# EAGLE board schmitt_rev2 (EAGLE 6.6.0)
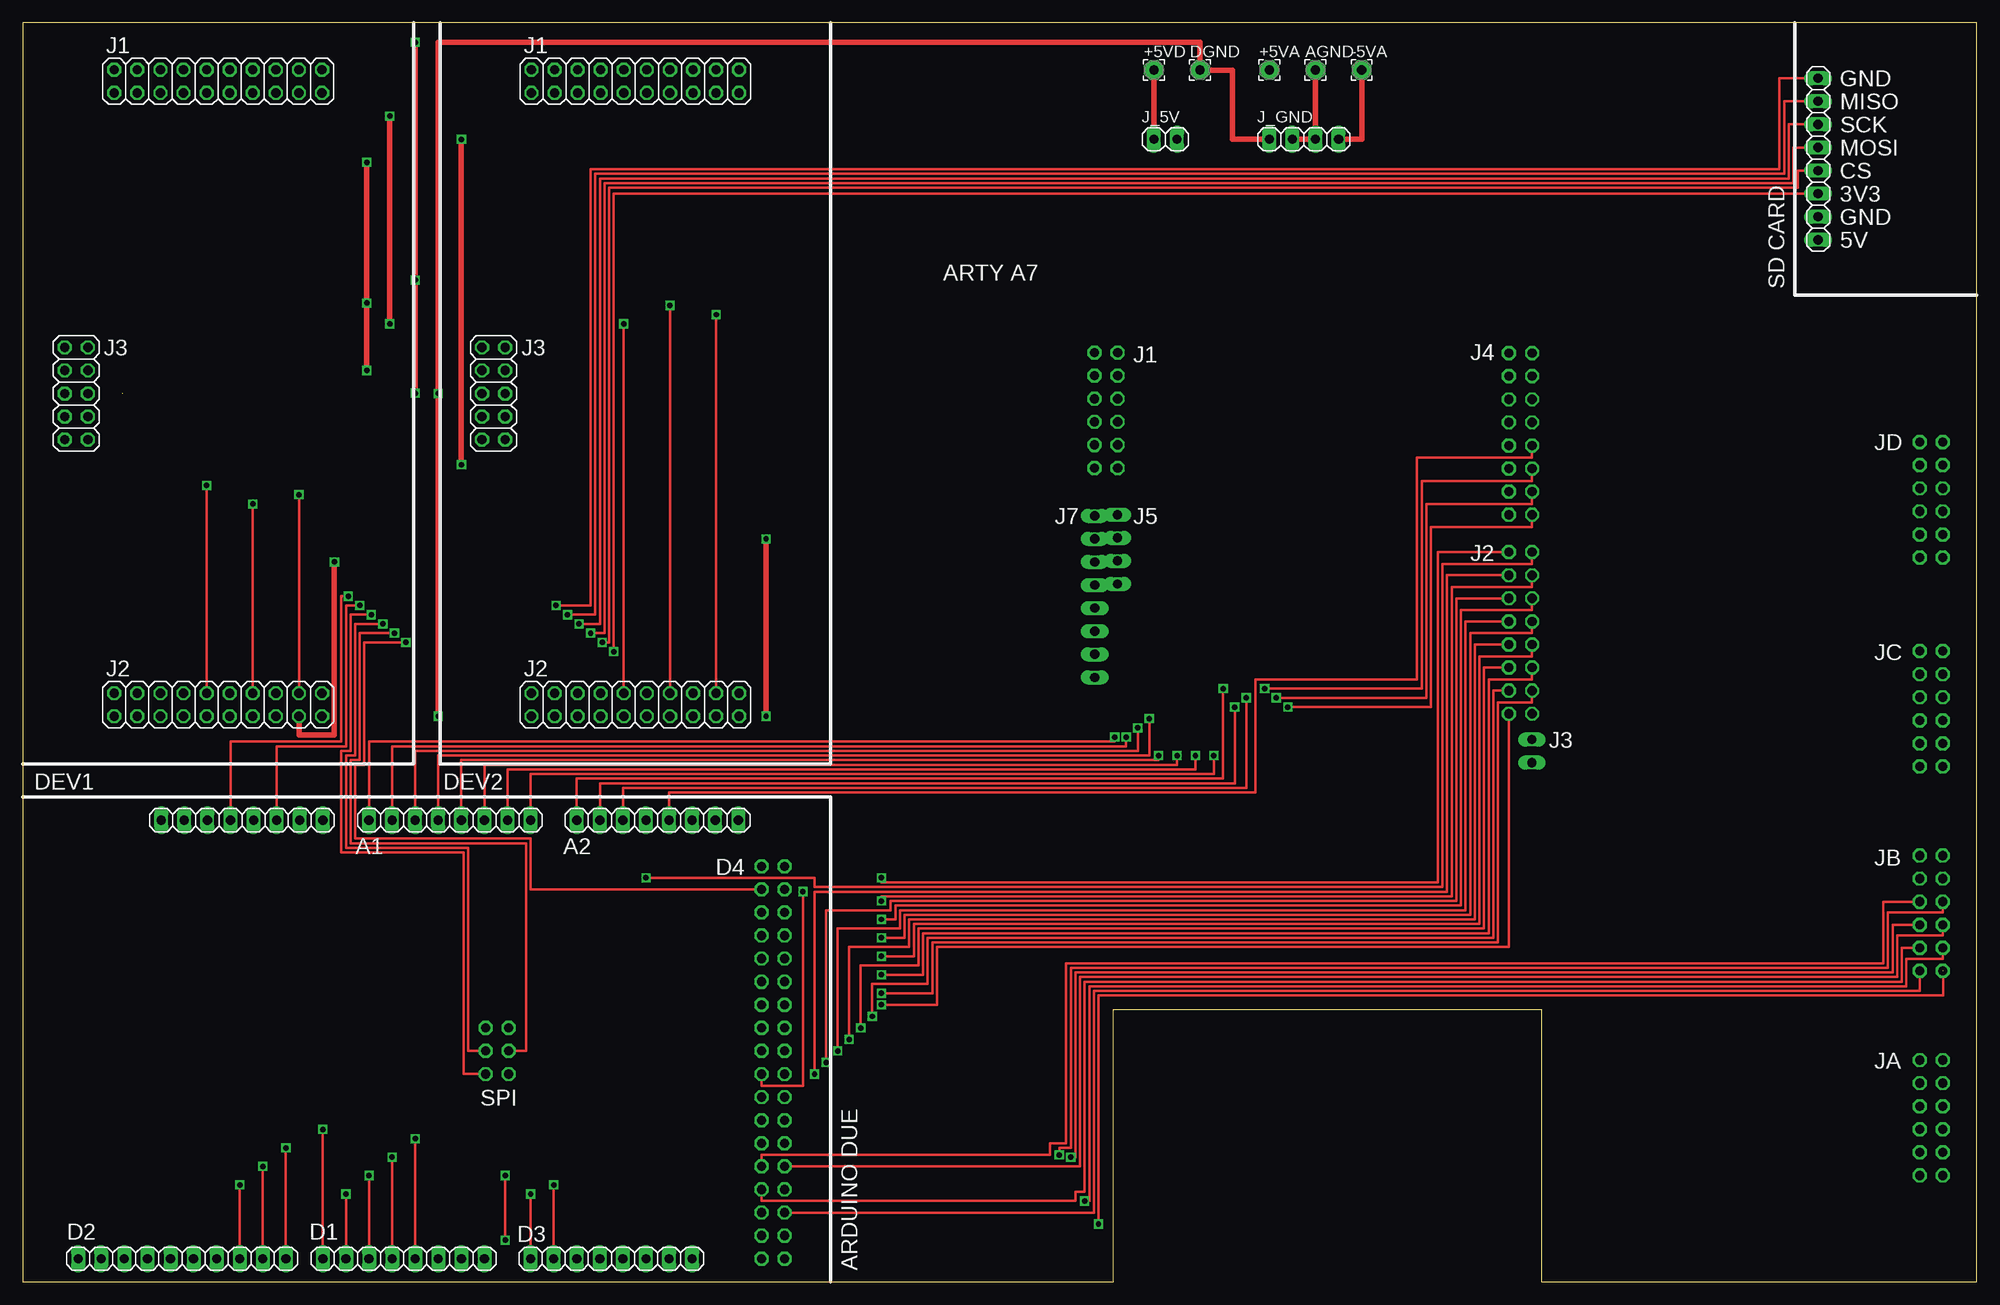
[diagram p0: board, top side]
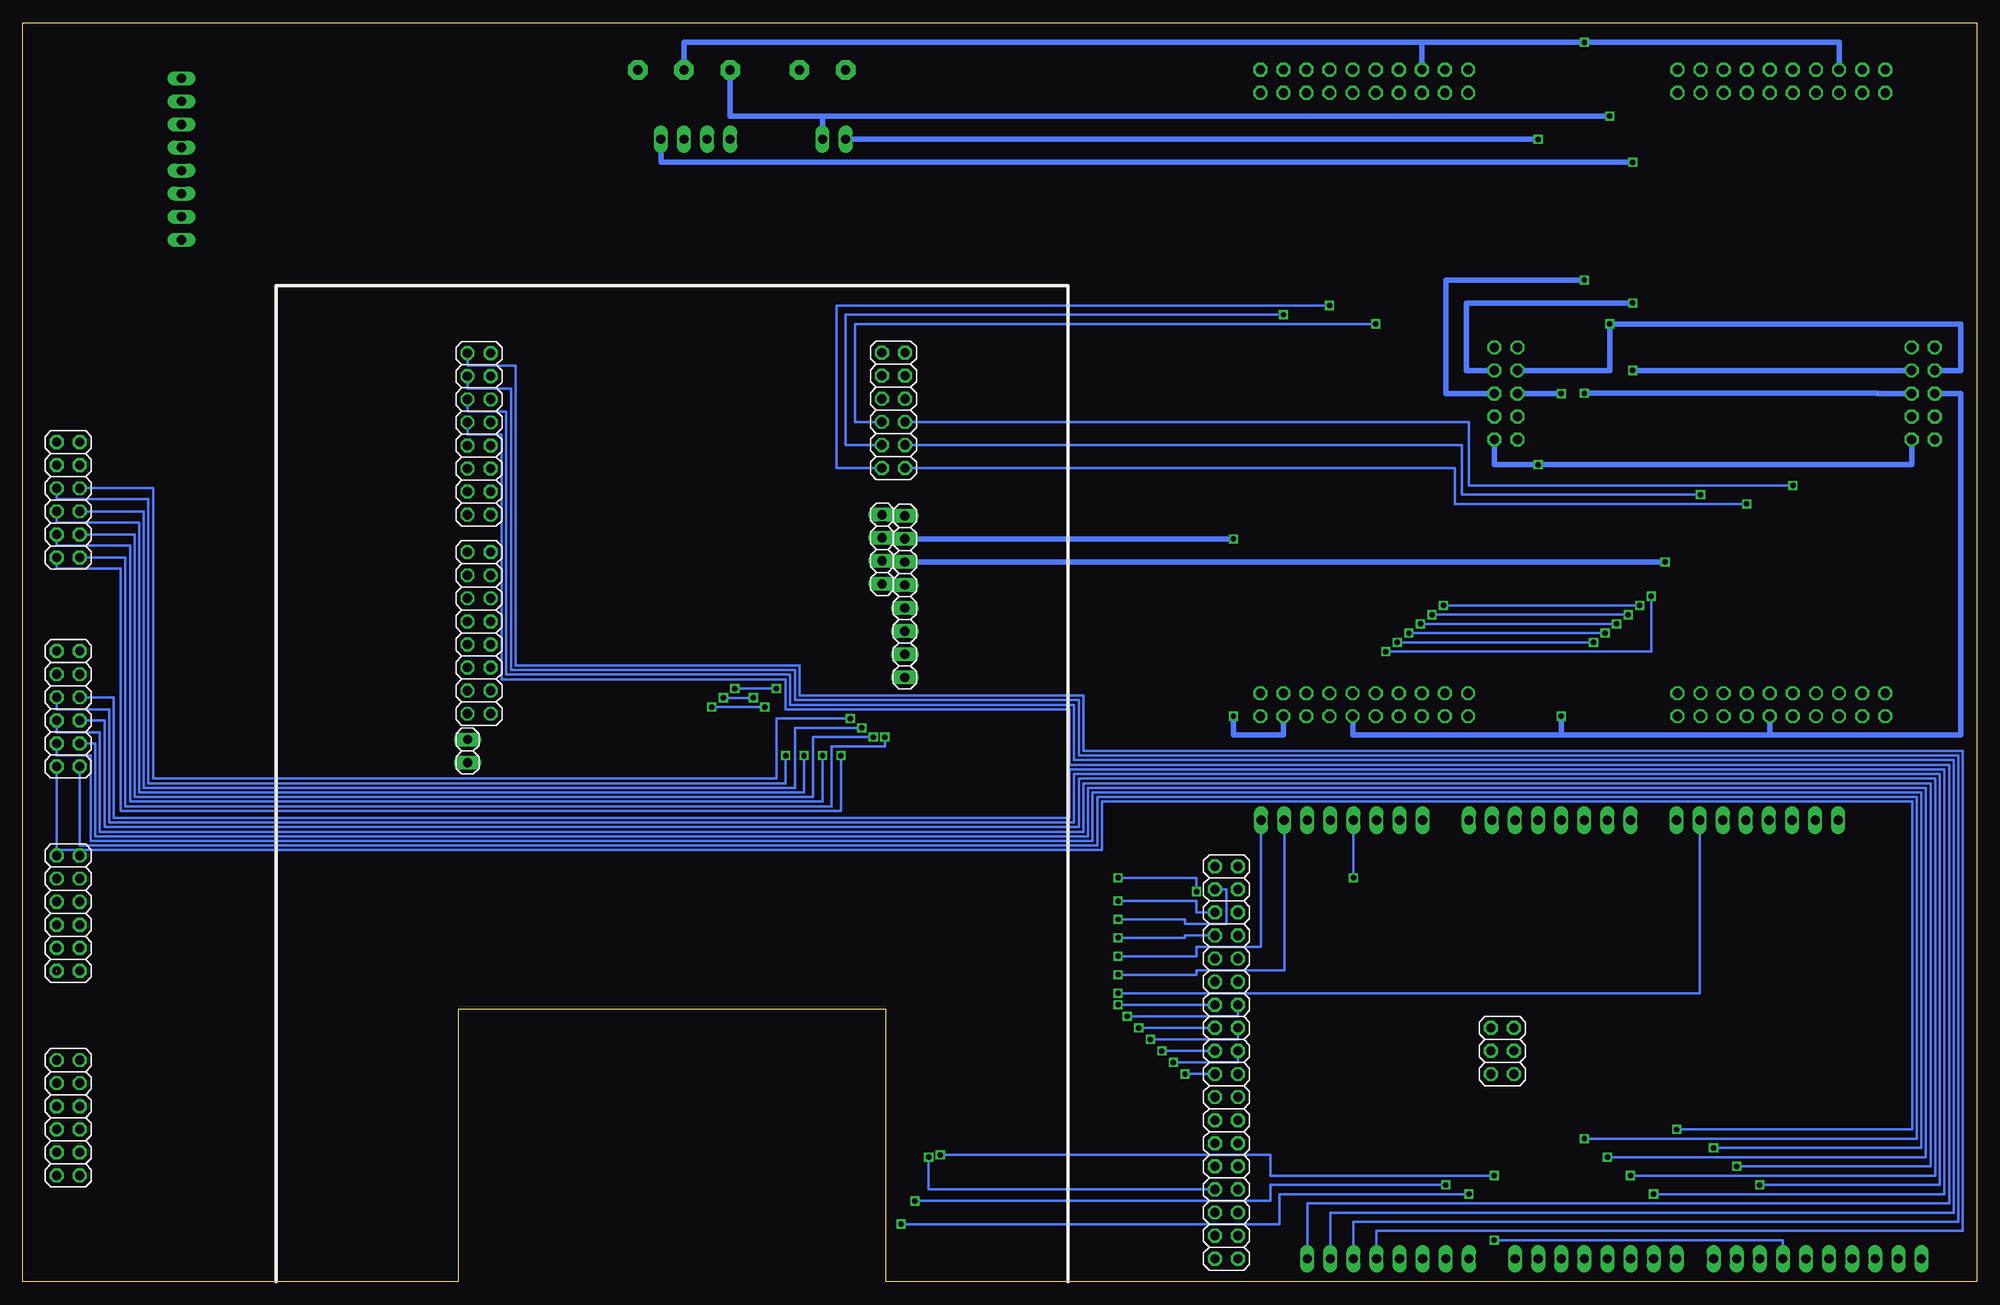
[diagram p1: board, bottom side, seen from below]

Size 215 x 138.55 mm. Coordinates in mm from the lower left corner, seen from the top.
Outline: 0,0 120,0 120,30 167.1,30 167.1,0 215,0 215,138.55 0,138.55 0,0
Copper layers (1*16): Top 0.035mm / dielectric 1.5mm / Bottom 0.035mm
Design rules "default": minimum track width 10mil, minimum drill 24mil, track to track 8mil, track to pad 8mil, pad to pad 8mil, via to via 8mil, smd to smd 8mil, copper to edge 40mil, drill to drill 8mil, minimum pad ring 10mil, minimum via ring 8mil, stop-mask expansion 4mil, vias tented up to drill 0mil, thermal gap 10mil

## Footprints (pad centres in the part's own frame; a part is rotated, then mirrored left to right if it is on the bottom)
2,15/1,0 = drill 1.016 pad 2.159 octagon: 1 0,0
1X08 = drill 1.016 long: 1 -8.89,0; 2 -6.35,0; 3 -3.81,0; 4 -1.27,0; 5 1.27,0; 6 3.81,0; 7 6.35,0; 8 8.89,0
1X10 = drill 1.016 long: 1 -11.43,0; 2 -8.89,0; 3 -6.35,0; 4 -3.81,0; 5 -1.27,0; 6 1.27,0; 7 3.81,0; 8 6.35,0; 9 8.89,0; 10 11.43,0
2X18 = drill 1.016 octagon: 1 -21.59,-1.27; 2 -21.59,1.27; 3 -19.05,-1.27; 4 -19.05,1.27; 5 -16.51,-1.27; 6 -16.51,1.27; 7 -13.97,-1.27; 8 -13.97,1.27; 9 -11.43,-1.27; 10 -11.43,1.27; 11 -8.89,-1.27; 12 -8.89,1.27; 13 -6.35,-1.27; 14 -6.35,1.27; 15 -3.81,-1.27; 16 -3.81,1.27; 17 -1.27,-1.27; 18 -1.27,1.27; 19 1.27,-1.27; 20 1.27,1.27; 21 3.81,-1.27; 22 3.81,1.27; 23 6.35,-1.27; 24 6.35,1.27; 25 8.89,-1.27; 26 8.89,1.27; 27 11.43,-1.27; 28 11.43,1.27; 29 13.97,-1.27; 30 13.97,1.27; 31 16.51,-1.27; 32 16.51,1.27; 33 19.05,-1.27; 34 19.05,1.27; 35 21.59,-1.27; 36 21.59,1.27
2X03 = drill 1.016 octagon: 1 -2.54,-1.27; 2 -2.54,1.27; 3 0,-1.27; 4 0,1.27; 5 2.54,-1.27; 6 2.54,1.27
2X06 = drill 1.016 octagon: 1 -6.35,-1.27; 2 -6.35,1.27; 3 -3.81,-1.27; 4 -3.81,1.27; 5 -1.27,-1.27; 6 -1.27,1.27; 7 1.27,-1.27; 8 1.27,1.27; 9 3.81,-1.27; 10 3.81,1.27; 11 6.35,-1.27; 12 6.35,1.27
2X08 = drill 1.016 octagon: 1 -8.89,-1.27; 2 -8.89,1.27; 3 -6.35,-1.27; 4 -6.35,1.27; 5 -3.81,-1.27; 6 -3.81,1.27; 7 -1.27,-1.27; 8 -1.27,1.27; 9 1.27,-1.27; 10 1.27,1.27; 11 3.81,-1.27; 12 3.81,1.27; 13 6.35,-1.27; 14 6.35,1.27; 15 8.89,-1.27; 16 8.89,1.27
1X02 = drill 1.016 long: 1 -1.27,0; 2 1.27,0
1X04 = drill 1.016 long: 1 -3.81,0; 2 -1.27,0; 3 1.27,0; 4 3.81,0
2X10 = drill 1.016 octagon: 1 -11.43,-1.27; 2 -11.43,1.27; 3 -8.89,-1.27; 4 -8.89,1.27; 5 -6.35,-1.27; 6 -6.35,1.27; 7 -3.81,-1.27; 8 -3.81,1.27; 9 -1.27,-1.27; 10 -1.27,1.27; 11 1.27,-1.27; 12 1.27,1.27; 13 3.81,-1.27; 14 3.81,1.27; 15 6.35,-1.27; 16 6.35,1.27; 17 8.89,-1.27; 18 8.89,1.27; 19 11.43,-1.27; 20 11.43,1.27
2X05 = drill 1.016 octagon: 1 -5.08,-1.27; 2 -5.08,1.27; 3 -2.54,-1.27; 4 -2.54,1.27; 5 0,-1.27; 6 0,1.27; 7 2.54,-1.27; 8 2.54,1.27; 9 5.08,-1.27; 10 5.08,1.27

## Placement (x,y rotation side)
+5VA  [2,15/1,0]  137.16,133.35 0 top
+5VD  [2,15/1,0]  124.46,133.35 0 top
-5VA  [2,15/1,0]  147.32,133.35 0 top
AGND  [2,15/1,0]  142.24,133.35 0 top
ARD  [1X08]  24.13,50.8 0 top
ARD_A1  [1X08]  46.99,50.8 0 top
ARD_A2  [1X08]  69.85,50.8 0 top
ARD_D1  [1X08]  41.91,2.54 180 top
ARD_D2  [1X10]  17.53,2.54 180 top
ARD_D3  [1X08]  64.77,2.54 0 top
ARD_D4  [2X18]  82.55,24.13 90 bottom
ARD_SPI  [2X03]  52.2,25.4 90 bottom
ARTY_J1  [2X06]  119.2,95.9 90 bottom
ARTY_J2  [2X08]  164.8,71.4 270 bottom
ARTY_J3  [1X02]  166.05,58.4 270 bottom
ARTY_J4  [2X08]  164.8,93.3 270 bottom
ARTY_J5  [1X04]  120.45,80.6 90 bottom
ARTY_J7  [1X08]  117.95,75.4 90 bottom
ARTY_JA  [2X06]  210,18.05 90 bottom
ARTY_JB  [2X06]  210,40.55 90 bottom
ARTY_JC  [2X06]  210,63.05 90 bottom
ARTY_JD  [2X06]  210,86.05 90 bottom
DEV1_J1  [2X10]  21.5,132.1 180 top
DEV1_J2  [2X10]  21.5,63.5 180 top
DEV1_J3  [2X05]  5.9,97.75 270 top
DEV2_J1  [2X10]  67.4,132.1 180 top
DEV2_J2  [2X10]  67.4,63.5 180 top
DEV2_J3  [2X05]  51.8,97.75 270 top
DGND  [2,15/1,0]  129.54,133.35 0 top
J_5V  [1X02]  125.73,125.73 0 top
J_GND  [1X04]  140.97,125.73 0 top
SD  [1X08]  197.54,123.55 90 top

## Library data of the parts
+5VA +5VD -5VA AGND DGND = wirepad
ARD ARD_A1 ARD_A2 ARD_D1-ARD_D4 ARD_SPI ARTY_J1-ARTY_J5 ARTY_J7 ARTY_JA ARTY_JB ARTY_JC ARTY_JD DEV1_J1-DEV1_J3 DEV2_J1-DEV2_J3 J_5V J_GND SD = pinhead

## Nets
+5VA: +5VA.1 DEV1_J3.3 DEV2_J3.3 J_5V.2
+5VD: +5VD.1 DEV1_J3.10 DEV2_J3.10 J_5V.1
-5VA: -5VA.1 DEV1_J3.4 DEV2_J3.4 J_GND.4
AGND: AGND.1 DEV1_J1.15 DEV1_J3.6 DEV2_J1.15 DEV2_J3.6 J_GND.2 J_GND.3
AMP0: ARD_D3.5 ARTY_J4.1
AMP1: ARD_D3.6 ARTY_J4.3
AMP2: ARD_D3.7 ARTY_J4.5
AMP3: ARD_D3.8 ARTY_J4.7
AR_GND: ARD.7 ARTY_J2.13
ARD_SPI: ARD_SPI.6
CHADDR: ARD_A2.5 ARTY_J4.9
D0: ARD_D4.6 ARTY_JB.1
D1: ARD_D4.7 ARTY_JB.3
D1_24: ARTY_J7.6 DEV1_J2.4
D2: ARD_D4.8 ARTY_JB.5
D2_24: ARTY_J7.7 DEV2_J2.4
D3: ARD_D4.9 ARTY_JB.7
D4: ARD_D3.1 ARTY_JB.2
D5: ARD_D3.2 ARTY_JB.4
D6: ARD_D4.10 ARTY_JB.6
D7: ARD_D2.4 ARTY_JB.8
DGND: DEV1_J2.10 DEV1_J3.5 DEV2_J2.10 DEV2_J3.5 DGND.1 J_GND.1
ENW: ARD_A2.1 ARTY_J4.11
EXT0: ARD_D4.17 ARTY_J2.2
EXT1: ARD_D4.18 ARTY_J2.4
EXT2: ARD_D4.19 ARTY_J2.6
EXT3: ARD_D4.20 ARTY_J2.8
EXT4: ARD_D4.21 ARTY_J2.10
EXT5: ARD_D4.22 ARTY_J2.12
EXT6: ARD_D4.23 ARTY_J2.14
EXT7: ARD_D4.24 ARTY_J2.16
II0: ARD_D1.4 ARTY_JC.1
II1: ARD_D1.5 ARTY_JC.3
II2: ARD_D1.6 ARTY_JC.5
II3: ARD_D1.7 ARTY_JC.7
II4: ARD_D1.8 ARTY_JC.2
II5: ARD_D2.1 ARTY_JC.4
II6: ARD_D2.2 ARTY_JC.6
II7: ARD_D2.3 ARTY_JC.8
IP0: ARD_A1.1 ARTY_JD.1
IP1: ARD_A1.2 ARTY_JD.3
IP2: ARD_A1.3 ARTY_JD.5
IP3: ARD_A1.4 ARTY_JD.7
IP4: ARD_A1.5 ARTY_JD.2
IP5: ARD_A1.6 ARTY_JD.4
IP6: ARD_A1.7 ARTY_JD.6
IP7: ARD_A1.8 ARTY_JD.8
MOSI0: ARTY_J1.5 DEV1_J2.11
MOSI1: ARTY_J1.6 DEV2_J2.11
N$1: DEV1_J1.1
N$2: SD.2
N$8: DEV1_J1.2
N$9: ARD_D2.10
N$11: SD.1
N$13: ARD_D2.5
N$14: ARD_D2.6
N$15: ARD_D2.7
N$16: ARD_D2.8
N$17: ARD_D2.9
N$20: ARD_D1.2
N$21: ARD_D1.3
N$26: ARD_D1.1
N$31: ARD_D3.4
N$32: ARD_D3.3
N$35: ARD_SPI.2
N$37: ARD_SPI.5
N$38: ARTY_J7.8
N$40: DEV1_J2.1
N$41: ARTY_J1.8
N$42: ARTY_J1.10
N$43: ARTY_J1.12
N$46: ARTY_J1.11
N$47: ARD_D4.1
N$48: ARD_D4.3
N$49: ARD_D4.5
N$52: ARD_D4.11
N$53: ARD_D4.13
N$54: ARD_D4.15
N$59: ARD_D4.25
N$60: ARD_D4.27
N$61: ARD_D4.29
N$62: ARD_D4.31
N$64: ARD_D4.35
N$65: ARD_D4.2
N$66: ARD_D4.4
N$70: ARD_D4.12
N$71: ARD_D4.14
N$72: ARD_D4.16
N$77: ARD_D4.26
N$78: ARD_D4.28
N$82: ARD_D4.36
N$83: DEV1_J2.2
N$88: ARD_A2.6
N$90: DEV1_J3.1
N$99: ARD.8
N$100: ARD.2
N$101: ARD.3
N$103: ARD.5
N$106: ARD.1
N$107: ARTY_J1.9
N$108: ARTY_J1.7
N$109: DEV1_J3.2
N$110: ARTY_JA.1
N$111: ARTY_JA.2
N$114: ARTY_J4.2
N$116: ARTY_J3.1
N$119: ARTY_J5.1
N$120: ARTY_J7.1
N$122: ARTY_JB.9
N$123: ARTY_JB.11
N$128: ARTY_JB.10
N$129: ARTY_JB.12
N$131: ARTY_JA.4
N$132: ARTY_JA.6
N$133: ARTY_JA.8
N$134: ARTY_JA.10
N$135: ARTY_JA.12
N$136: ARTY_JA.11
N$137: ARTY_JA.9
N$138: ARTY_JA.7
N$139: ARTY_JA.5
N$140: ARTY_JA.3
N$146: ARTY_JD.10
N$147: ARTY_JD.12
N$148: ARTY_JD.11
N$149: ARTY_JD.9
N$158: ARTY_JC.10
N$159: ARTY_JC.12
N$160: ARTY_JC.11
N$161: ARTY_JC.9
N$167: ARTY_J2.15
N$177: ARTY_J3.2
N$187: ARTY_J4.4
N$188: ARTY_J4.6
N$189: ARTY_J4.8
N$190: ARTY_J4.10
N$191: ARTY_J4.12
N$192: ARTY_J4.14
N$193: ARTY_J4.16
N$195: ARTY_J5.2
N$196: ARTY_J5.3
N$197: ARTY_J5.4
N$205: ARTY_J7.2
N$206: ARTY_J7.3
N$207: ARTY_J7.4
N$208: ARTY_J7.5
N$213: DEV1_J1.3
N$214: DEV1_J1.5
N$215: DEV1_J1.7
N$216: DEV1_J1.9
N$217: DEV1_J1.11
N$218: DEV1_J1.13
N$220: DEV1_J1.17
N$221: DEV1_J1.19
N$222: DEV1_J1.20
N$223: DEV1_J1.18
N$224: DEV1_J1.16
N$225: DEV1_J1.14
N$226: DEV1_J1.12
N$227: DEV1_J1.10
N$228: DEV1_J1.8
N$229: DEV1_J1.6
N$230: DEV1_J1.4
N$234: DEV1_J2.5
N$236: DEV1_J2.9
N$238: DEV1_J2.13
N$239: DEV1_J2.15
N$240: DEV1_J2.17
N$241: DEV1_J2.19
N$242: DEV1_J2.20
N$243: DEV1_J2.18
N$244: DEV1_J2.16
N$245: DEV1_J2.14
N$246: DEV1_J2.12
N$248: DEV1_J2.8
N$249: DEV1_J2.6
N$255: DEV1_J3.7
N$256: DEV1_J3.9
N$260: DEV1_J3.8
N$262: DEV2_J1.1
N$263: DEV2_J1.3
N$264: DEV2_J1.5
N$265: DEV2_J1.7
N$266: DEV2_J1.9
N$267: DEV2_J1.11
N$268: DEV2_J1.13
N$270: DEV2_J1.17
N$271: DEV2_J1.19
N$272: DEV2_J1.20
N$273: DEV2_J1.18
N$274: DEV2_J1.16
N$275: DEV2_J1.14
N$276: DEV2_J1.12
N$277: DEV2_J1.10
N$278: DEV2_J1.8
N$279: DEV2_J1.6
N$280: DEV2_J1.4
N$281: DEV2_J1.2
N$282: DEV2_J2.1
N$284: DEV2_J2.5
N$286: DEV2_J2.9
N$288: DEV2_J2.13
N$289: DEV2_J2.15
N$290: DEV2_J2.17
N$291: DEV2_J2.19
N$292: DEV2_J2.20
N$293: DEV2_J2.18
N$294: DEV2_J2.16
N$295: DEV2_J2.14
N$296: DEV2_J2.12
N$298: DEV2_J2.8
N$299: DEV2_J2.6
N$301: DEV2_J2.2
N$302: DEV2_J3.1
N$305: DEV2_J3.7
N$306: DEV2_J3.9
N$307: DEV2_J3.2
N$310: DEV2_J3.8
RST: ARD_A2.7 ARTY_J2.11
RSTCH: ARD_A2.8 ARTY_J2.9
SCLK0: ARTY_J1.3 DEV1_J2.3
SCLK1: ARTY_J1.4 DEV2_J2.3
SD_3V3: ARD.4 SD.3
SD_CS: ARD_D4.33 SD.4
SD_GND: ARD.6 SD.8
SD_MISO: ARD_SPI.1 SD.7
SD_MOSI: ARD_SPI.4 SD.5
SD_SCK: ARD_SPI.3 SD.6
SS0: ARTY_J1.1 DEV1_J2.7
SS1: ARTY_J1.2 DEV2_J2.7
TRG0: ARD_D4.30 ARTY_J2.7
TRG1: ARD_D4.32 ARTY_J2.3
TRG2: ARD_D4.34 ARTY_J2.5
W: ARD_A2.2 ARTY_J4.15
WCONF: ARD_A2.4 ARTY_J2.1
WVADDR: ARD_A2.3 ARTY_J4.13

## Tracks (layer width: path | path; a pad name or v marks a point on that pad's centre or on a via)
+5VA  (via drill 0.6)
  Top 0.61: v40.39,128.27 v40.39,105.41
  Bottom 0.61: 127,128.27 137.16,128.27 +5VA.1 | DEV1_J3.3 1.78,100.29 1.78,105.41 v40.39,105.41 40.39,100.29 DEV2_J3.3 | J_5V.2 127,128.27 | 127,128.27 v40.39,128.27
+5VD  (via drill 0.6)
  Top 0.61: +5VD.1 J_5V.1 | v48.26,125.73 v48.26,89.92
  Bottom 0.61: DEV2_J3.10 53.07,89.92 v48.26,89.92 7.17,89.92 DEV1_J3.10 | J_5V.1 v48.26,125.73
-5VA  (via drill 0.6)
  Top 0.61: J_GND.4 147.32,125.73 -5VA.1 | v37.85,123.19 v37.85,107.7 v37.85,100.29
  Bottom 0.61: v37.85,107.7 56.13,107.7 56.13,100.29 DEV2_J3.4 | J_GND.4 144.78,123.19 v37.85,123.19 | DEV1_J3.4 v37.85,100.29
AGND  (via drill 0.6)  (1 unrouted)
  Top 0.61: AGND.1 J_GND.3 J_GND.2 | v43.18,136.4 v43.18,110.24 v43.18,97.79
  Bottom 0.61: DEV1_J1.15 15.15,136.4 v43.18,136.4 61.05,136.4 | DEV2_J1.15 61.05,136.4 | 61.05,136.4 142.24,136.4 AGND.1 | DEV1_J3.6 10.92,97.75 | v43.18,110.24 58.42,110.24 58.42,97.75 DEV2_J3.6 | 10.92,97.79 v43.18,97.79
AMP0
  Bottom 0.254: ARD_D3.5 66.04,5.59 1.52,5.59 1.52,58.42 98.3,58.42 98.3,64.52 129.54,64.52 129.54,67.82 160.78,67.82 160.78,100.84 166.07,100.84 ARTY_J4.1
AMP1
  Bottom 0.254: ARD_D3.6 68.58,6.6 2.03,6.6 2.03,57.91 98.81,57.91 98.81,64.01 130.05,64.01 130.05,67.31 161.29,67.31 161.29,98.3 166.07,98.3 ARTY_J4.3
AMP2
  Bottom 0.254: ARD_D3.7 71.12,7.62 2.54,7.62 2.54,57.4 99.31,57.4 99.31,63.5 130.56,63.5 130.56,66.8 161.8,66.8 161.8,95.76 166.07,95.76 ARTY_J4.5
AMP3
  Bottom 0.254: ARD_D3.8 73.66,8.64 3.05,8.64 3.05,56.9 99.82,56.9 99.82,62.99 131.06,62.99 131.06,66.29 162.31,66.29 162.31,93.22 166.07,93.22 ARTY_J4.7
AR_GND  (via drill 0.6)
  Top 0.254: v94.49,31.75 100.08,31.75 100.08,37.34 162.31,37.34 162.31,63.75 166.07,63.75 ARTY_J2.13
  Bottom 0.254: ARD.7 30.48,31.75 v94.49,31.75
CHADDR
  Top 0.254: ARD_A2.5 71.12,53.85 135.64,53.85 135.64,66.29 153.42,66.29 153.42,90.68 166.07,90.68 ARTY_J4.9
D0
  Top 0.254: ARD_D4.6 117.86,7.62 117.86,32 208.73,32 ARTY_JB.1
D1
  Top 0.254: ARD_D4.7 81.28,8.89 115.82,8.89 115.82,9.91 116.84,9.91 116.84,33.02 206.76,33.02 206.76,36.74 ARTY_JB.3
D1_24  (via drill 0.6)
  Top 0.61: DEV1_J2.4 30.39,60.2 34.29,60.2 v34.29,79.21
  Bottom 0.61: v34.29,79.21 ARTY_J7.6
D2  (via drill 0.6)
  Top 0.254: v115.32,13.72 115.82,13.72 115.82,34.04 205.74,34.04 205.74,39.28 ARTY_JB.5
  Bottom 0.254: ARD_D4.8 115.32,10.16 v115.32,13.72
D2_24  (via drill 0.6)
  Top 0.61: v81.79,62.23 v81.79,81.75
  Bottom 0.61: DEV2_J2.4 76.29,60.2 81.79,60.2 v81.79,62.23 | v81.79,81.75 ARTY_J7.7
D3
  Top 0.254: ARD_D4.9 81.28,13.97 113.03,13.97 113.03,15.24 114.81,15.24 114.81,35.05 204.72,35.05 204.72,41.82 ARTY_JB.7
D4  (via drill 0.6)  (1 unrouted)
  Top 0.254: ARD_D3.1 v55.88,9.65 | v118.36,6.35 118.36,31.5 211.33,31.5 211.33,34.2
  Bottom 0.254: v55.88,9.65 76.71,9.65 76.71,6.35 v118.36,6.35
D5  (via drill 0.6)
  Top 0.254: ARD_D3.2 v58.42,10.67 | v116.84,8.89 117.35,8.89 117.35,32.51 207.26,32.51 207.26,35.56 211.27,35.56 ARTY_JB.4
  Bottom 0.254: v58.42,10.67 77.72,10.67 77.72,8.89 v116.84,8.89
D6
  Top 0.254: ARD_D4.10 116.33,12.7 116.33,33.53 206.25,33.53 206.25,38.1 211.27,38.1 ARTY_JB.6
D7  (via drill 0.6)
  Top 0.254: v53.09,4.57 v53.09,11.68 | v114.05,13.97 114.05,14.73 115.32,14.73 115.32,34.54 205.23,34.54 205.23,40.64 211.27,40.64 ARTY_JB.8
  Bottom 0.254: ARD_D2.4 21.34,4.57 v53.09,4.57 | v53.09,11.68 77.72,11.68 77.72,13.97 v114.05,13.97
DGND  (via drill 0.6)
  Top 0.61: J_GND.1 133.1,125.73 133.1,133.35 DGND.1 129.54,136.4 45.72,136.4 v45.72,97.75 v45.72,62.23
  Bottom 0.61: DEV1_J3.5 1.78,97.75 1.78,60.2 22.77,60.2 | 22.77,60.2 DEV1_J2.10 | DEV2_J2.10 68.67,60.2 45.72,60.2 | v45.72,97.75 DEV2_J3.5 | 22.77,60.2 45.72,60.2 | v45.72,62.23 45.72,60.2
ENW  (via drill 0.6)
  Top 0.254: ARD_A2.1 60.96,55.37 132.08,55.37 v132.08,65.28 | v136.65,65.28 153.92,65.28 153.92,88.14 166.07,88.14 ARTY_J4.11
  Bottom 0.254: v132.08,65.28 v136.65,65.28
EXT0  (via drill 0.6)
  Top 0.254: ARD_D4.17 81.28,21.59 85.85,21.59 v85.85,42.93 | v94.49,44.45 94.49,43.94 155.7,43.94 155.7,80.29 ARTY_J2.2
  Bottom 0.254: v85.85,42.93 85.85,44.45 v94.49,44.45
EXT1  (via drill 0.6)
  Top 0.254: v87.12,22.86 87.12,42.93 156.72,42.93 156.72,77.22 156.72,77.47 156.72,77.75 ARTY_J2.4
  Bottom 0.254: ARD_D4.18 v87.12,22.86
EXT2  (via drill 0.6)
  Top 0.254: v88.39,24.13 88.39,40.89 95.5,40.89 95.5,41.91 157.73,41.91 157.73,75.21 ARTY_J2.6
  Bottom 0.254: ARD_D4.19 81.28,24.13 v88.39,24.13
EXT3  (via drill 0.6)
  Top 0.254: v89.66,25.4 89.66,38.86 96.52,38.86 96.52,40.89 158.75,40.89 158.75,71.37 158.75,71.88 158.75,72.67 ARTY_J2.8
  Bottom 0.254: ARD_D4.20 v89.66,25.4
EXT4  (via drill 0.6)
  Top 0.254: v90.93,26.67 90.93,36.83 97.54,36.83 97.54,39.88 159.77,39.88 159.77,70.13 ARTY_J2.10
  Bottom 0.254: ARD_D4.21 81.28,26.67 v90.93,26.67
EXT5  (via drill 0.6)
  Top 0.254: v92.2,27.94 92.2,34.8 98.55,34.8 98.55,38.86 160.78,38.86 160.78,61.72 160.78,61.98 160.78,67.59 ARTY_J2.12
  Bottom 0.254: ARD_D4.22 v92.2,27.94
EXT6  (via drill 0.6)
  Top 0.254: v93.47,29.21 93.47,32.77 99.57,32.77 99.57,37.85 161.8,37.85 161.8,64.52 161.8,64.77 161.8,65.05 ARTY_J2.14
  Bottom 0.254: ARD_D4.23 81.28,29.21 v93.47,29.21
EXT7  (via drill 0.6)
  Top 0.254: v94.49,30.48 100.58,30.48 100.58,36.83 163.53,36.83 ARTY_J2.16
  Bottom 0.254: ARD_D4.24 v94.49,30.48
II0  (via drill 0.6)
  Top 0.254: ARD_D1.4 v43.18,15.75
  Bottom 0.254: v43.18,15.75 6.6,15.75 6.6,53.34 96.77,53.34 96.77,48.01 208.73,48.01 ARTY_JC.1
II1  (via drill 0.6)
  Top 0.254: ARD_D1.5 v40.64,13.72
  Bottom 0.254: v40.64,13.72 5.59,13.72 5.59,54.36 97.79,54.36 97.79,49.02 207.01,49.02 207.01,59.24 ARTY_JC.3
II2  (via drill 0.6)
  Top 0.254: ARD_D1.6 v38.1,11.68
  Bottom 0.254: v38.1,11.68 4.57,11.68 4.57,55.37 98.81,55.37 98.81,50.04 205.99,50.04 205.99,61.78 ARTY_JC.5
II3  (via drill 0.6)
  Top 0.254: ARD_D1.7 v35.56,9.65
  Bottom 0.254: v35.56,9.65 3.56,9.65 3.56,56.39 99.82,56.39 99.82,51.05 204.98,51.05 204.98,64.32 ARTY_JC.7
II4  (via drill 0.6)
  Top 0.254: ARD_D1.8 v33.02,16.76
  Bottom 0.254: v33.02,16.76 7.11,16.76 7.11,52.83 96.27,52.83 96.27,47.5 211.27,47.5 ARTY_JC.2
II5  (via drill 0.6)
  Top 0.254: ARD_D2.1 v28.96,14.73
  Bottom 0.254: v28.96,14.73 6.1,14.73 6.1,53.85 97.28,53.85 97.28,48.51 207.52,48.51 207.52,57.91 211.27,57.91 ARTY_JC.4
II6  (via drill 0.6)
  Top 0.254: ARD_D2.2 v26.42,12.7
  Bottom 0.254: v26.42,12.7 5.08,12.7 5.08,54.86 98.3,54.86 98.3,49.53 206.5,49.53 206.5,60.45 211.27,60.45 ARTY_JC.6
II7  (via drill 0.6)
  Top 0.254: ARD_D2.3 v23.88,10.67
  Bottom 0.254: v23.88,10.67 4.06,10.67 4.06,55.88 99.31,55.88 99.31,50.55 205.49,50.55 205.49,62.99 211.27,62.99 ARTY_JC.8
IP0  (via drill 0.6)
  Top 0.254: ARD_A1.1 38.1,59.44 120.14,59.44 v120.14,59.94
  Bottom 0.254: v120.14,59.94 120.14,58.93 125.98,58.93 125.98,52.32 203.71,52.32 203.71,79.7 ARTY_JD.1
IP1  (via drill 0.6)
  Top 0.254: ARD_A1.2 40.64,58.93 121.41,58.93 v121.41,59.94
  Bottom 0.254: v121.41,59.94 128.02,59.94 128.02,53.34 202.69,53.34 202.69,82.24 ARTY_JD.3
IP2  (via drill 0.6)
  Top 0.254: ARD_A1.3 43.18,58.42 122.68,58.42 v122.68,60.96
  Bottom 0.254: v122.68,60.96 130.05,60.96 130.05,54.36 201.68,54.36 201.68,84.78 ARTY_JD.5
IP3  (via drill 0.6)
  Top 0.254: ARD_A1.4 45.72,57.91 123.95,57.91 v123.95,61.98
  Bottom 0.254: v123.95,61.98 132.08,61.98 132.08,55.37 200.66,55.37 200.66,87.32 ARTY_JD.7
IP4  (via drill 0.6)
  Top 0.254: ARD_A1.5 48.26,57.4 124.97,57.4 v124.97,57.91
  Bottom 0.254: v124.97,57.91 124.97,51.82 204.22,51.82 204.22,78.49 211.27,78.49 ARTY_JD.2
IP5  (via drill 0.6)
  Top 0.254: ARD_A1.6 50.8,56.9 127,56.9 v127,57.91
  Bottom 0.254: v127,57.91 127,52.83 203.2,52.83 203.2,81.03 211.27,81.03 ARTY_JD.4
IP6  (via drill 0.6)
  Top 0.254: ARD_A1.7 53.34,56.39 129.03,56.39 v129.03,57.91
  Bottom 0.254: v129.03,57.91 129.03,53.85 202.18,53.85 202.18,83.57 211.27,83.57 ARTY_JD.6
IP7  (via drill 0.6)
  Top 0.254: ARD_A1.8 55.88,55.88 131.06,55.88 v131.06,57.91
  Bottom 0.254: v131.06,57.91 131.06,54.86 201.17,54.86 201.17,86.11 211.27,86.11 ARTY_JD.8
MOSI0  (via drill 0.6)
  Top 0.254: DEV1_J2.11 v20.23,87.63
  Bottom 0.254: v20.23,87.63 55.88,87.63 55.88,94.63 ARTY_J1.5
MOSI1  (via drill 0.6)
  Top 0.254: DEV2_J2.11 v66.13,105.41
  Bottom 0.254: v66.13,105.41 123.44,105.41 123.44,94.63 ARTY_J1.6
RST  (via drill 0.6)
  Top 0.254: v94.49,33.78 99.06,33.78 99.06,38.35 161.29,38.35 161.29,66.29 166.07,66.29 ARTY_J2.11
  Bottom 0.254: ARD_A2.7 76.2,34.29 85.85,34.29 85.85,33.78 v94.49,33.78
RSTCH  (via drill 0.6)
  Top 0.254: v94.49,35.81 98.04,35.81 98.04,39.37 160.27,39.37 160.27,68.83 166.07,68.83 ARTY_J2.9
  Bottom 0.254: ARD_A2.8 78.74,36.83 85.85,36.83 85.85,35.81 v94.49,35.81
SCLK0  (via drill 0.6)
  Top 0.254: DEV1_J2.3 v30.39,86.61
  Bottom 0.254: v30.39,86.61 56.64,86.61 56.64,92.09 ARTY_J1.3
SCLK1  (via drill 0.6)
  Top 0.254: DEV2_J2.3 v76.29,106.43
  Bottom 0.254: v76.29,106.43 124.46,106.43 124.46,92.09 ARTY_J1.4
SD_3V3  (via drill 0.6)
  Top 0.254: ARD.4 22.86,59.44 35.05,59.44 35.05,75.44 v35.81,75.44 | v65.02,69.34 65.02,119.74 SD.3
  Bottom 0.254: v35.81,75.44 35.81,69.34 v65.02,69.34
SD_CS  (via drill 0.6)
  Top 0.254: ARD_D4.33 55.88,43.18 55.88,48.77 36.58,48.77 36.58,56.9 37.59,56.9 37.59,70.36 v42.16,70.36 | v63.75,70.36 64.52,70.36 64.52,120.4 195.33,120.4 195.33,122.28 SD.4
  Bottom 0.254: v42.16,70.36 v63.75,70.36
SD_GND  (via drill 0.6)
  Top 0.254: ARD.6 27.94,58.93 35.56,58.93 35.56,74.42 v37.08,74.42 | v58.67,74.42 62.48,74.42 62.48,122.43 193.29,122.43 193.29,132.44 SD.8
  Bottom 0.254: v37.08,74.42 v58.67,74.42
SD_MISO  (via drill 0.6)
  Top 0.254: ARD_SPI.1 48.51,22.86 48.51,47.24 35.05,47.24 35.05,58.42 36.07,58.42 36.07,73.41 v38.35,73.41 | v59.94,73.41 62.99,73.41 62.99,121.92 193.8,121.92 193.8,129.9 SD.7
  Bottom 0.254: v38.35,73.41 v59.94,73.41
SD_MOSI  (via drill 0.6)
  Top 0.254: ARD_SPI.4 55.37,25.4 55.37,48.26 36.07,48.26 36.07,57.4 37.08,57.4 37.08,71.37 v40.89,71.37 | v62.48,71.37 64.01,71.37 64.01,120.9 194.82,120.9 194.82,124.82 SD.5
  Bottom 0.254: v40.89,71.37 v62.48,71.37
SD_SCK  (via drill 0.6)
  Top 0.254: ARD_SPI.3 49.02,25.4 49.02,47.75 35.56,47.75 35.56,57.91 36.58,57.91 36.58,72.39 v39.62,72.39 | v61.21,72.39 63.5,72.39 63.5,121.41 194.31,121.41 194.31,127.36 SD.6
  Bottom 0.254: v39.62,72.39 v61.21,72.39
SS0  (via drill 0.6)
  Top 0.254: DEV1_J2.7 v25.31,85.6
  Bottom 0.254: v25.31,85.6 57.4,85.6 57.4,89.55 ARTY_J1.1
SS1  (via drill 0.6)
  Top 0.254: DEV2_J2.7 v71.21,107.44
  Bottom 0.254: v71.21,107.44 125.48,107.44 125.48,89.55 ARTY_J1.2
TRG0  (via drill 0.6)
  Top 0.254: v94.49,37.85 97.03,37.85 97.03,40.39 159.26,40.39 159.26,71.37 166.07,71.37 ARTY_J2.7
  Bottom 0.254: ARD_D4.30 87.12,38.1 87.12,37.85 v94.49,37.85
TRG1  (via drill 0.6)
  Top 0.254: v94.49,41.91 94.49,42.42 157.23,42.42 157.23,76.45 166.07,76.45 ARTY_J2.3
  Bottom 0.254: ARD_D4.32 85.85,40.64 85.85,41.91 v94.49,41.91
TRG2  (via drill 0.6)
  Top 0.254: v94.49,39.88 96.01,39.88 96.01,41.4 158.24,41.4 158.24,73.91 166.07,73.91 ARTY_J2.5
  Bottom 0.254: ARD_D4.34 82.55,43.18 82.55,39.37 87.12,39.37 87.12,39.88 v94.49,39.88
W  (via drill 0.6)
  Top 0.254: ARD_A2.2 63.5,54.86 133.35,54.86 v133.35,63.25 | v139.19,63.25 154.94,63.25 154.94,83.06 166.07,83.06 ARTY_J4.15
  Bottom 0.254: v133.35,63.25 v139.19,63.25
WCONF  (via drill 0.6)
  Top 0.254: v68.58,44.45 87.12,44.45 87.12,43.43 156.21,43.43 156.21,78.99 166.07,78.99 ARTY_J2.1
  Bottom 0.254: ARD_A2.4 v68.58,44.45
WVADDR  (via drill 0.6)
  Top 0.254: ARD_A2.3 66.04,54.36 134.62,54.36 v134.62,64.26 | v137.92,64.26 154.43,64.26 154.43,85.6 166.07,85.6 ARTY_J4.13
  Bottom 0.254: v134.62,64.26 v137.92,64.26

## Text on the board
tPlace: J1 | J1 | GND | MISO | SCK | MOSI | CS | 3V3 | GND | 5V | ARTY A7 | SD CARD | J3 | J3 | J1 | J4 | JD | J7 | J5 | J2 | JC | J2 | J2 | J3 | DEV1 | DEV2 | A1 | A2 | JB | D4 | JA | SPI | D2 | D1 | D3 | ARDUINO DUE